# Altium PCB v7-9BProto-motorPCB.PcbDoc
Units mil, origin at the board's own origin, x right, y up, seen from the top; angles counter-clockwise.
Board outline 3468 x 3684.34 mil, 2 copper layers (Top Layer, Bottom Layer); 91 components, 114 nets, 309 pads, 47 vias.
Unrouted connection lines stored in the file: 234.
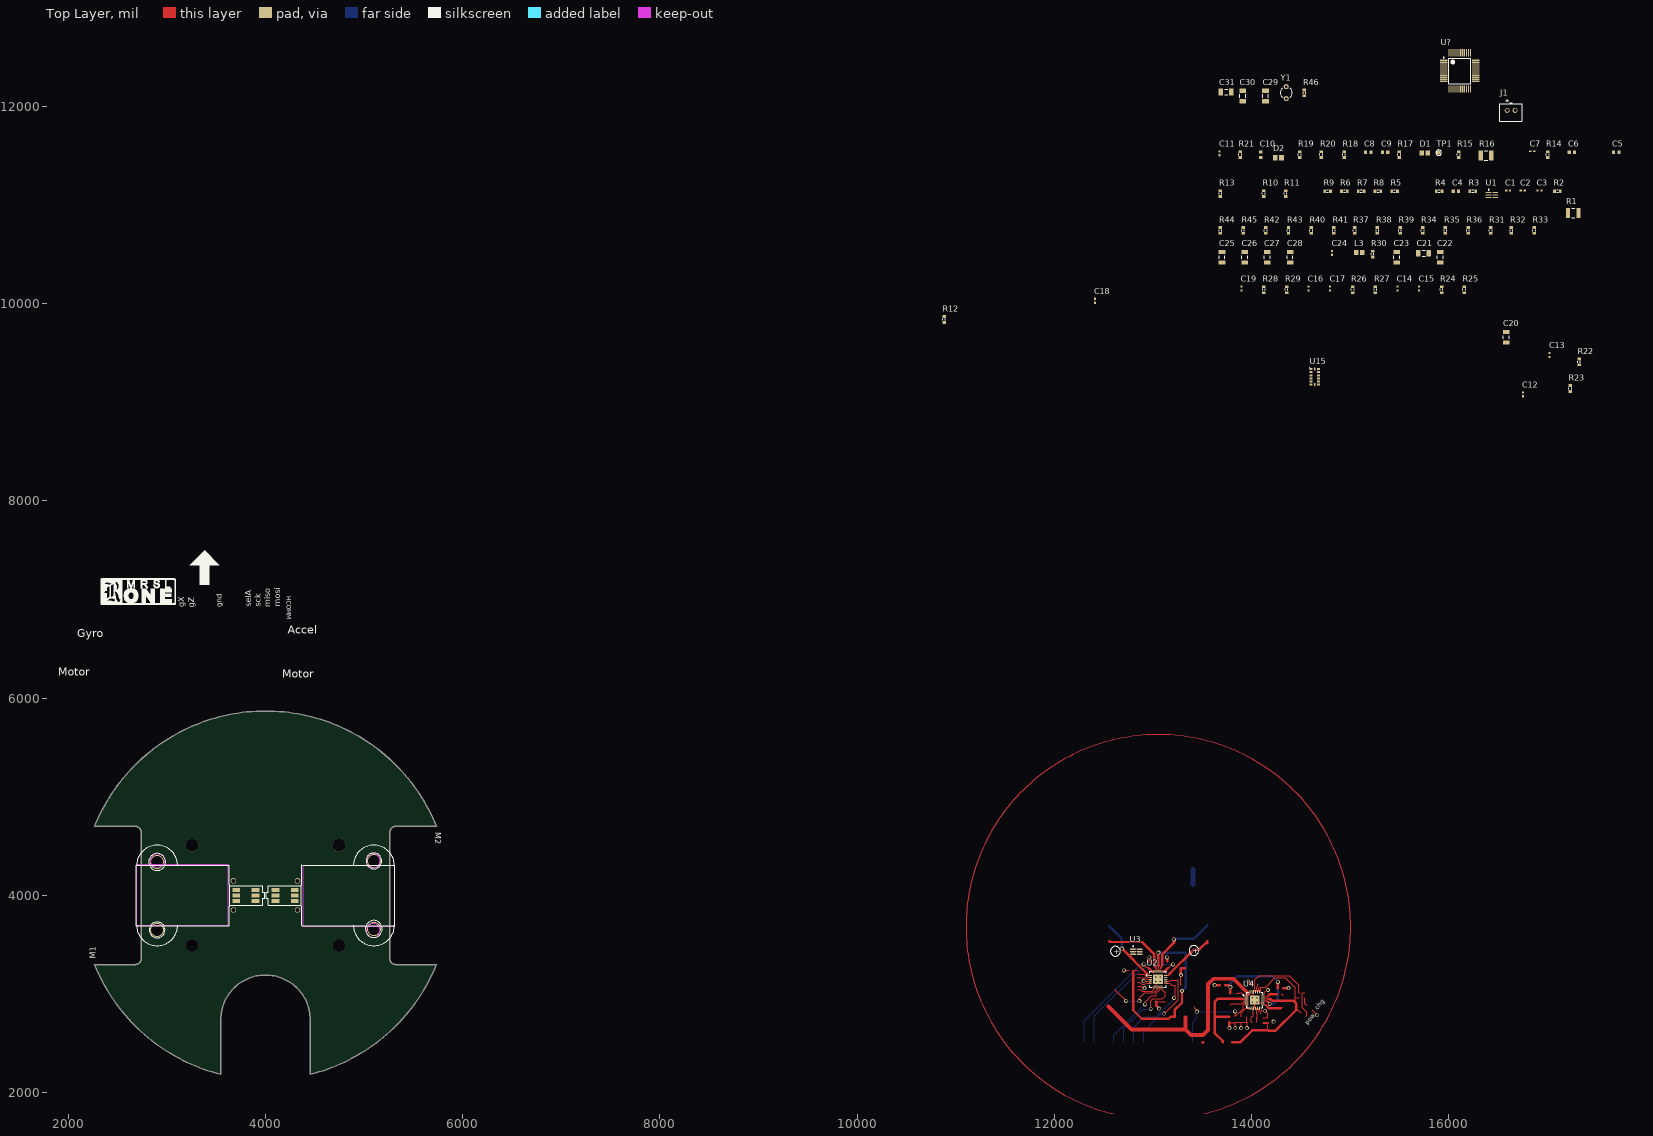
[diagram p0: Top Layer view]
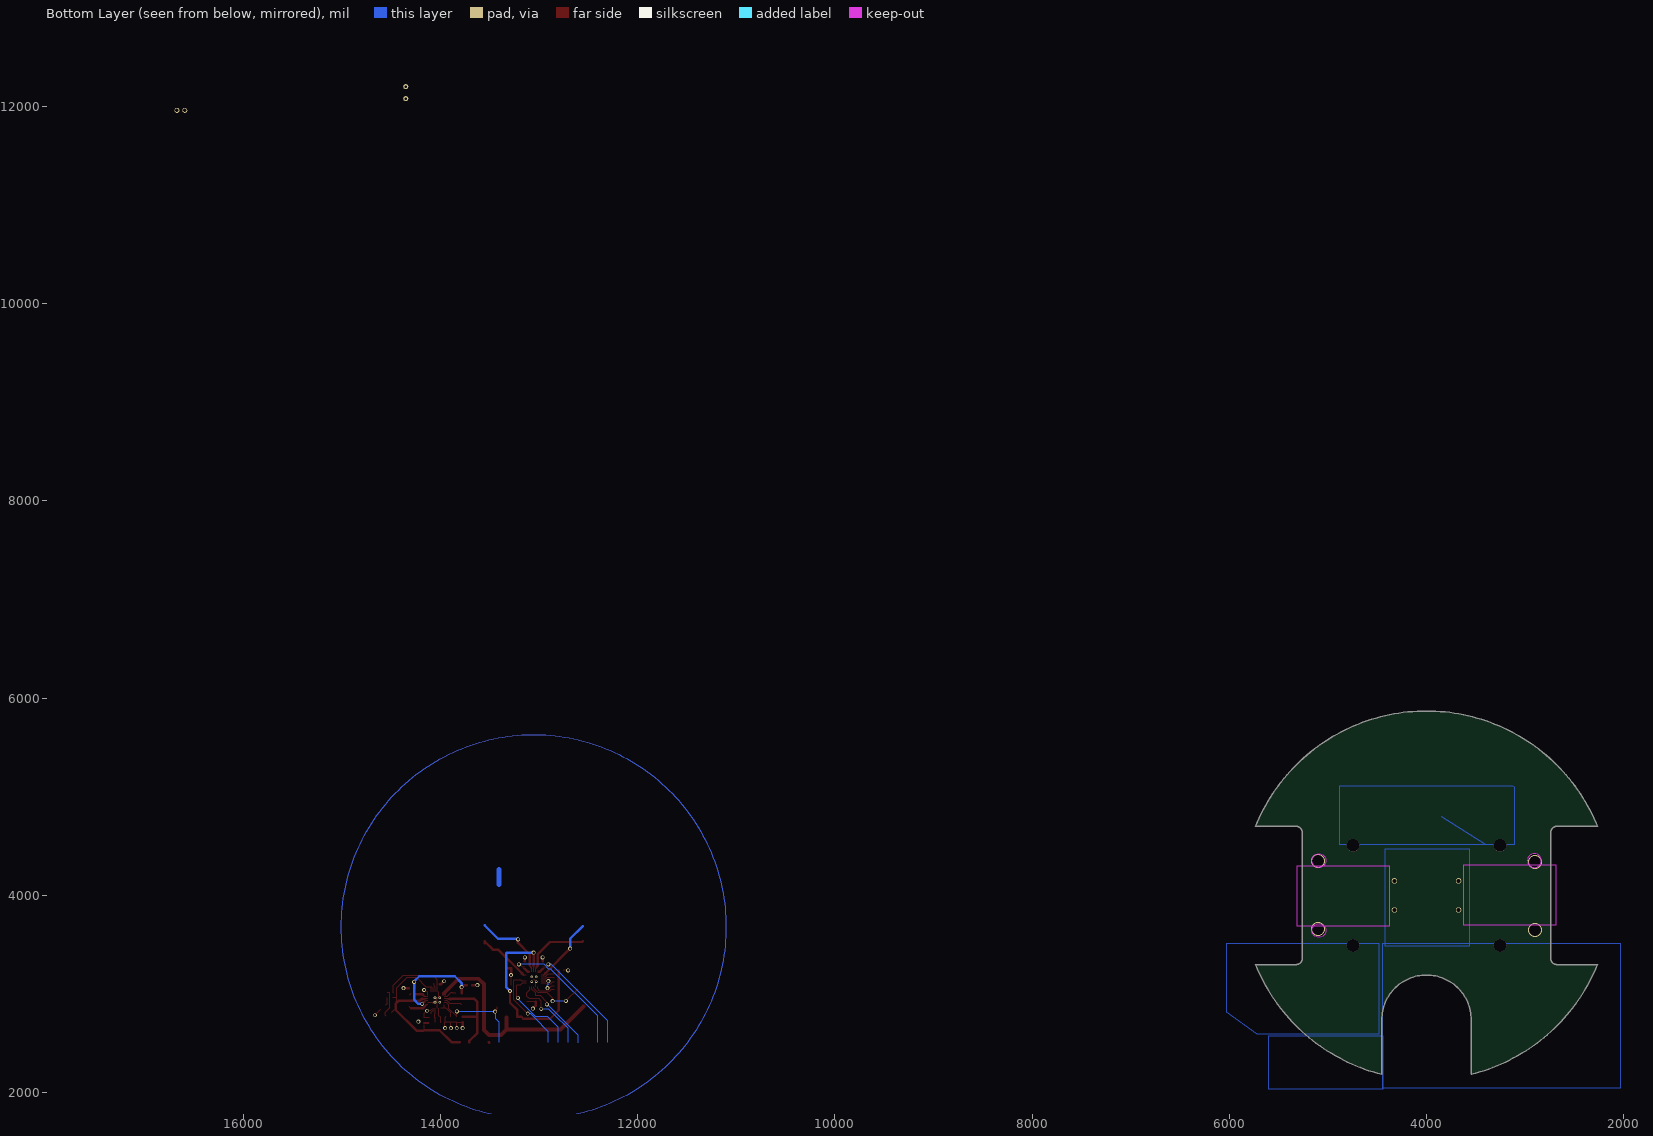
[diagram p1: Bottom Layer view, seen from below]

## Layer stack, top to bottom
Top Layer: signal copper 1.4
Dielectric: dielectric 12.6, FR-4, Dk 4.8
Bottom Layer: signal copper 1.4

## Board outline
2266,3299 2677,3299 ccw(c2677,3362) 2740,3362 2740,4638 ccw(c2677,4638) 2677,4701 2266,4701 2266.46,4701.24 cw(c4000,4000) 5733.69,4700.88 5734,4701 5323,4701 ccw(c5323,4638) 5260,4638 5260,3362 ccw(c5323,3362) 5323,3299 5734,3299 5733.69,3299.12 cw(c4000,4000) 4453.06,2185.71 4453,2186 4453,2740 ccw(c4000,2740) 3547,2740 3547,2186 3547.16,2185.66 cw(c4000,4000)
cut-out: 2906,4282.66 2892.28,4284.01 2879.08,4288.02 2866.92,4294.52 2856.26,4303.26 2847.52,4313.92 2841.02,4326.08 2837.01,4339.28 2835.66,4353 2837.01,4366.72 2841.02,4379.92 2847.52,4392.08 2856.26,4402.74 2866.92,4411.48 2879.08,4417.98 2892.28,4421.99 2906,4423.34 2919.72,4421.99 2932.92,4417.98 2945.08,4411.48 2955.74,4402.74 2964.48,4392.08 2970.98,4379.92 2974.99,4366.72 2976.34,4353 2974.99,4339.28 2970.98,4326.08 2964.48,4313.92 2955.74,4303.26 2945.08,4294.52 2932.92,4288.02 2919.72,4284.01
cut-out: 5021.66,3645 5023.01,3631.28 5027.02,3618.08 5033.52,3605.92 5042.26,3595.26 5052.92,3586.52 5065.08,3580.02 5078.28,3576.01 5092,3574.66 5105.72,3576.01 5118.92,3580.02 5131.08,3586.52 5141.74,3595.26 5150.48,3605.92 5156.98,3618.08 5160.99,3631.28 5162.34,3645 5160.99,3658.72 5156.98,3671.92 5150.48,3684.08 5141.74,3694.74 5131.08,3703.48 5118.92,3709.98 5105.72,3713.99 5092,3715.34 5078.28,3713.99 5065.08,3709.98 5052.92,3703.48 5042.26,3694.74 5033.52,3684.08 5027.02,3671.92 5023.01,3658.72
cut-out: 5021.66,4353 5023.01,4339.28 5027.02,4326.08 5033.52,4313.92 5042.26,4303.26 5052.92,4294.52 5065.08,4288.02 5078.28,4284.01 5092,4282.66 5105.72,4284.01 5118.92,4288.02 5131.08,4294.52 5141.74,4303.26 5150.48,4313.92 5156.98,4326.08 5160.99,4339.28 5162.34,4353 5160.99,4366.72 5156.98,4379.92 5150.48,4392.08 5141.74,4402.74 5131.08,4411.48 5118.92,4417.98 5105.72,4421.99 5092,4423.34 5078.28,4421.99 5065.08,4417.98 5052.92,4411.48 5042.26,4402.74 5033.52,4392.08 5027.02,4379.92 5023.01,4366.72

## Design rules (kind name [scope] priority, off if disabled: settings)
Clearance [All] p1: gap=8
PolygonConnect [All] p1: connectstyle=Relief reliefconductorwidth=10 reliefentries=4 polygonreliefangle="90 Angle"
RoomDefinition SoundChip [InComponentClass('SoundChip')] p1: confinementstyle=ConfineIn formatcopy=TRUE lockcomponents=FALSE outline 13654,11716 15158,11716 15158,12292 13654,12292
RoomDefinition power [InComponentClass('power')] p2: confinementstyle=ConfineIn formatcopy=TRUE lockcomponents=FALSE outline 13654,10087 17773,10087 17773,11667 13654,11667
RoomDefinition GyroAccelHeaders [InComponentClass('GyroAccelHeaders')] p3: confinementstyle=ConfineIn formatcopy=TRUE lockcomponents=FALSE outline 13654,10111 16763,10111 16763,11667 13654,11667
RoomDefinition BumpSensors [InComponentClass('BumpSensors')] p4: confinementstyle=ConfineIn formatcopy=TRUE lockcomponents=FALSE outline 13654,10087 17217,10087 17217,10297 13654,10297
RoomDefinition LineCliffSensors [InComponentClass('LineCliffSensors')] p5: confinementstyle=ConfineIn formatcopy=TRUE lockcomponents=FALSE outline 0,0 2000,0 2000,1000 0,1000
RoomDefinition motorEncoder [InComponentClass('motorEncoder')] p6: confinementstyle=ConfineIn formatcopy=TRUE lockcomponents=FALSE outline 0,0 2000,0 2000,1000 0,1000
RoutingVias [All] p1: holewidth=25 width=40 viastyle="Through Hole" minholewidth=25 minwidth=40 maxholewidth=25 maxwidth=40
SMDNeckDown [All] p1: percent=50.000
SilkscreenOverComponentPads [All] p1: minsilkscreentomaskgap=10
SolderMaskExpansion [All] p1: expansion=4
Width "Schematic Width Constraint_2" [InNet('VBAT')] p1: maxlimit=25 minlimit=10 preferedwidth=25 minimp=50.000000 maximp=50.000000 favimp=50.000000
Width "Schematic Width Constraint_14" [InNet('NetJ1_1')] p2: maxlimit=25 minlimit=10 preferedwidth=25 minimp=50.000000 maximp=50.000000 favimp=50.000000
Width "Schematic Width Constraint_13" [InNet('5VUSB_SW')] p3: maxlimit=25 minlimit=10 preferedwidth=25 minimp=50.000000 maximp=50.000000 favimp=50.000000
Width "Schematic Width Constraint_12" [InNet('MOT_0B')] p4: maxlimit=25 minlimit=10 preferedwidth=20 minimp=50.000000 maximp=50.000000 favimp=50.000000
Width "Schematic Width Constraint_11" [InNet('MOT_0A')] p5: maxlimit=25 minlimit=10 preferedwidth=20 minimp=50.000000 maximp=50.000000 favimp=50.000000
Width "Schematic Width Constraint_10" [InNet('MOT1_B')] p6: maxlimit=25 minlimit=10 preferedwidth=20 minimp=50.000000 maximp=50.000000 favimp=50.000000
Width "Schematic Width Constraint_9" [InNet('MOT1_A')] p7: maxlimit=25 minlimit=10 preferedwidth=20 minimp=50.000000 maximp=50.000000 favimp=50.000000
Width "Schematic Width Constraint_8" [InNet('VBAT_MOT_SW')] p8: maxlimit=25 minlimit=10 preferedwidth=20 minimp=50.000000 maximp=50.000000 favimp=50.000000
Width "Schematic Width Constraint_7" [InNet('VBAT +300')] p9: maxlimit=25 minlimit=10 preferedwidth=25 minimp=50.000000 maximp=50.000000 favimp=50.000000
Width "Schematic Width Constraint_6" [InNet('NetL2_1')] p10: maxlimit=25 minlimit=10 preferedwidth=25 minimp=50.000000 maximp=50.000000 favimp=50.000000
Width "Schematic Width Constraint_5" [InNet('NetL2_2')] p11: maxlimit=25 minlimit=10 preferedwidth=25 minimp=50.000000 maximp=50.000000 favimp=50.000000
Width "Schematic Width Constraint_3" [InNet('VBAT_SW')] p12: maxlimit=50 minlimit=10 preferedwidth=25 minimp=50.000000 maximp=50.000000 favimp=50.000000
Width "Schematic Width Constraint_1" [InNet('GND')] p13: maxlimit=25 minlimit=10 preferedwidth=25 minimp=50.000000 maximp=50.000000 favimp=50.000000
Width "Schematic Width Constraint" [InNet('3.3V')] p14: maxlimit=100 minlimit=10 preferedwidth=25 minimp=50.000000 maximp=50.000000 favimp=50.000000
Width MotorWidth [InNetClass('MotorNets')] p15: maxlimit=25 minlimit=8 preferedwidth=25
Width [All] p16: maxlimit=8 minlimit=8 preferedwidth=8
27 further rules are at their usual default settings.

## Classes and differential pairs
component class GyroAccelHeaders: C20 C21 C22 C23 C24 C25 C26 C27 C28 C51 J2 L3 R30 U15
component class LineCliffSensors: Q1 Q2 Q3 Q4 Q5 R31 R32 R33 R34 R35 R36 R37 R38 R39 R40 R41 R42 R43 R44 R45 U9 U10 U11 U12 U13
component class motorEncoder: C1 C2 C3 C4 M1 M2 P1 R1 R2 R3 R4 R5 R6 R7 R8 R9 R10 R11 R12 R13 U1 U2 U3
component class power: C5 C6 C7 C8 C9 C10 C11 D1 D2 J1 J3 L1 L2 R14 R15 R16 R17 R18 R19 R20 R21 TP1 U4
component class SoundChip: * C29 C30 C31 C? R46 R? U? Y1 Y?
component class BumpSensors: C12 C13 C14 C15 C16 C17 C18 C19 R22 R23 R24 R25 R26 R27 R28 R29 U5 U6 U7 U8 U9 U10 U11 U12

## Components (designator, comment, footprint, x,y, rotation, side; value= is the part's Value field where it differs from the comment)
C1 "Cap Semi" CAPC1005L 16599,11150 r0 top
C2 "Cap Semi" CAPC1005L 16749,11150 r0 top
C3 "Cap Semi" CAPC1005L 16918,11150 r0 top
C4 "Cap Semi" CAPC1608L 16071,11142 r0 top
C5 "Cap" CAPC1608L 17697,11538 r0 top
C6 "Cap" CAPC1608L 17247,11538 r0 top
C7 "Cap" CAPC1005L 16845,11546 r0 top
C8 "Cap" CAPC1608L 15182,11538 r0 top
C9 "Cap" CAPC1608L 15352,11538 r0 top
C10 "Cap" CAPC1608L 14093,11512 r90 top
C11 "Cap" CAPC1005L 13675,11524 r90 top
C12 "Cap Semi" CAPC1005L 16750,9080 r90 top
C13 "Cap Semi" CAPC1005L 17020,9480 r90 top
C14 "Cap Semi" CAPC1005L 15476,10154 r90 top
C15 "Cap Semi" CAPC1005L 15697,10154 r90 top
C16 "Cap Semi" CAPC1005L 14576,10154 r90 top
C17 "Cap Semi" CAPC1005L 14796,10154 r90 top
C18 "Cap Semi" CAPC1005L 12410,10030 r90 top
C19 "Cap Semi" CAPC1005L 13895,10154 r90 top
C20 "Cap Semi" CAPC3216L 16580,9660 r90 top
C21 "Cap Semi" CAPC3216L 15743,10513 r0 top
C22 "Cap Semi" CAPC3216L 15913,10472 r90 top
C23 "Cap Semi" CAPC3216L 15472,10472 r90 top
C24 "Cap Semi" CAPC1005L 14815,10515 r90 top
C25 "Cap Semi" CAPC3216L 13699,10472 r90 top
C26 "Cap Semi" CAPC3216L 13929,10472 r90 top
C27 "Cap Semi" CAPC3216L 14159,10472 r90 top
C28 "Cap Semi" CAPC3216L 14389,10472 r90 top
C29 "Cap Semi" CAPC3216L 14140,12106 r90 top
C30 "Cap Semi" CAPC3216L 13910,12106 r90 top
C31 "Cap Semi" CAPC3216L 13740,12147 r0 top
D1 "Charge" INDC2012L 15754,11528 r0 top
D2 "Power" INDC2012L 14270,11480 r0 top
J1 "Bat" BatteryConnJST 16630,11960 r0 top
L3 "Inductor" INDC2012L 15091,10519 r0 top
M1 "motorEncoder_V7b" motorEncoder_V7b 3950,4000 r180 top
M2 "motorEncoder_V7b" motorEncoder_V7b 4050,4000 r0 top
R1 "Res3" RESC3225L 17260,10920 r0 top
R2 "" RESC1608L 17100,11142 r0 top
R3 "" RESC1608L 16241,11142 r0 top
R4 "" RESC1608L 15901,11142 r0 top
R5 "" RESC1608L 15449,11142 r0 top
R6 "Res3" RESC1608L 14939,11142 r0 top
R7 "Res3" RESC1608L 15109,11142 r0 top
R8 "Res3" RESC1608L 15279,11142 r0 top
R9 "Res3" RESC1608L 14769,11142 r0 top
R10 "Res3" RESC1608L 14123,11116 r90 top
R11 "Res3" RESC1608L 14343,11116 r90 top
R12 "" RESC1608L 10880,9840 r90 top
R13 "" RESC1608L 13683,11116 r90 top
R14 "Res3" RESC1608L 17001,11512 r90 top
R15 "Res3" RESC1608L 16099,11512 r90 top
R16 "Res3" RESC3225L 16376,11504 r0 top
R17 "Res3" RESC1608L 15496,11512 r90 top
R18 "Res3" RESC1608L 14936,11512 r90 top
R19 "Res3" RESC1608L 14486,11512 r90 top
R20 "Res3" RESC1608L 14706,11512 r90 top
R21 "Res3" RESC1608L 13883,11512 r90 top
R22 "Res3" RESC1608L 17320,9410 r90 top
R23 "Res3" RESC1608L 17230,9140 r90 top
R24 "Res3" RESC1608L 15925,10142 r90 top
R25 "Res3" RESC1608L 16155,10142 r90 top
R26 "Res3" RESC1608L 15024,10142 r90 top
R27 "Res3" RESC1608L 15254,10142 r90 top
R28 "Res3" RESC1608L 14124,10142 r90 top
R29 "Res3" RESC1608L 14354,10142 r90 top
R30 "Res3" RESC1608L 15226,10503 r90 top
R31 "Res3" RESC1608L 16424,10743 r90 top
R32 "Res3" RESC1608L 16634,10743 r90 top
R33 "Res3" RESC1608L 16864,10743 r90 top
R34 "Res3" RESC1608L 15734,10743 r90 top
R35 "Res3" RESC1608L 15964,10743 r90 top
R36 "Res3" RESC1608L 16194,10743 r90 top
R37 "Res3" RESC1608L 15044,10743 r90 top
R38 "Res3" RESC1608L 15274,10743 r90 top
R39 "Res3" RESC1608L 15504,10743 r90 top
R40 "Res3" RESC1608L 14603,10743 r90 top
R41 "Res3" RESC1608L 14833,10743 r90 top
R42 "Res3" RESC1608L 14143,10743 r90 top
R43 "Res3" RESC1608L 14373,10743 r90 top
R44 "Res3" RESC1608L 13683,10743 r90 top
R45 "Res3" RESC1608L 13913,10743 r90 top
R46 "Res3" RESC1608L 14534,12137 r90 top
TP1 "TestPoint" TestPoint 15896,11531 r0 top
U1 "schmit trigger" DCK(R-PDSO-C6) 16436,11102 r0 top
U2 "MOTOR-A3906" QFN-20 13050,3150 r0 top
U3 "schmit trigger" DCK(R-PDSO-C6) 12830,3430 r0 top
U4 "LTC3566" QFN-24 14030,2940 r0 top
U15 "MMA7455L" MMA7455L 14580,9160 r0 top
U? "VS1033" LQFP-48 16110,12360 r0 top
Y1 "12.288MHZ" BCY-W2/D3.1 14350,12140 r0 top

## Footprints (in the part's own frame and the unit in brackets; to place one, negate y for a bottom-side part, rotate by r counter-clockwise, add the part's x,y. Pads: shape width x height; smd on the part's side, far side on the other; paste and mask are expansions set on the pad)
BatteryConnJST [mil] "Connector for Battery"
  round 50 hole 35: 1(-40,0) 2(40,0)
  silkscreen extent -117,-110 116,115
BCY-W2/D3.1 [mm] "Crystal, Thru-Hole; 2 Leads; Body 3.1 x 8.2 mm (Dia.xH)"
  round 1.3 hole 0.7: 1(0,1.55) 2(0,-1.55)
  silkscreen extent -1.55,-1.19 1.55,1.17
CAPC1005L [mm] "Chip Capacitor, Body 1.0x0.5mm, IPC High Density"
  rect 0.6x0.5 smd: 1(-0.5,0) 2(0.5,0)
  body extent -0.55,-0.3 0.55,0.3, height 1.3
CAPC1608L [mm] "Chip Capacitor, Body 1.6x0.8mm, IPC High Density"
  rect 0.8x0.9 smd: 1(-0.7,0) 2(0.7,0)
  body extent -0.87,-0.48 0.87,0.48, height 1.3
CAPC3216L [mm] "Chip Capacitor, Body 3.2x1.6mm, IPC High Density"
  rect 1.1x1.7 smd: 1(-1.35,0) 2(1.35,0)
  silkscreen extent -0.4,-0.75 0.4,0.75, body extent -1.7,-0.9 1.7,0.9, height 1.3
DCK(R-PDSO-C6) [mm] "TSOP, 6-Leads, Body 2.2x1.4mm (max), Pitch 0.65mm, IPC Medium Density"
  oval 1.5x0.35 smd: 1(-0.85,0.65) 2(-0.85,0) 3(-0.85,-0.65) 4(0.85,-0.65) 5(0.85,0) 6(0.85,0.65)
  silkscreen extent -0.97,1.25 -0.72,1.5, body extent -0.7,-1.07 0.7,1.08, height 1.1
INDC2012L [mm] "Chip Inductor, Body 2.0x1.2mm, IPC High Density"
  rect 1.2x1.4 smd: 1(-0.8,0) 2(0.8,0)
  body extent -1.1,-0.7 1.1,0.7, height 0.55
LQFP-48 [mm] "TSQFP, 48-Leads, Body 9.1x9.1mm (max), Pitch 0.50mm, IPC Medium Density"
  rect 1.9x0.3 smd: 1(-4.15,2.75) 2(-4.15,2.25) 3(-4.15,1.75) 4(-4.15,1.25) 5(-4.15,0.75) 6(-4.15,0.25) 7(-4.15,-0.25) 8(-4.15,-0.75) 9(-4.15,-1.25) 10(-4.15,-1.75) 11(-4.15,-2.25) 12(-4.15,-2.75) 25(4.15,-2.75) 26(4.15,-2.25) 27(4.15,-1.75) 28(4.15,-1.25) 29(4.15,-0.75) 30(4.15,-0.25) 31(4.15,0.25) 32(4.15,0.75) 33(4.15,1.25) 34(4.15,1.75) 35(4.15,2.25) 36(4.15,2.75)
  rect 0.3x1.9 smd: 13(-2.75,-4.65) 14(-2.25,-4.65) 15(-1.75,-4.65) 16(-1.25,-4.65) 17(-0.75,-4.65) 18(-0.25,-4.65) 19(0.25,-4.65) 20(0.75,-4.65) 21(1.25,-4.65) 22(1.75,-4.65) 23(2.25,-4.65) 24(2.75,-4.65) 37(2.75,4.65) 38(2.25,4.65) 39(1.75,4.65) 40(1.25,4.65) 41(0.75,4.65) 42(0.25,4.65) 43(-0.25,4.65) 44(-0.75,4.65) 45(-1.25,4.65) 46(-1.75,4.65) 47(-2.25,4.65) 48(-2.75,4.65)
  silkscreen extent -4.27,-3.3 2.8,3.57, body extent -3.5,-3.5 3.5,3.5, height 1.6
MMA7455L [mm] "LGA, 14 pad, accelerometer footprint"
  rect 0.8x0.5 smd: 1(0.499,4.499) 2(0.499,3.699) 3(0.499,2.9) 4(0.499,2.1) 5(0.499,1.301) 6(0.499,0.501) 8(2.501,0.501) 9(2.501,1.301) 10(2.501,2.1) 11(2.501,2.9) 12(2.501,3.699) 13(2.501,4.499)
  rect 0.5x0.8 smd: 7(1.5,0.501) 14(1.5,4.507)
  silkscreen extent 0.18,4.72 0.28,4.83
motorEncoder_V7b [mm] "Precision Wire Wound Inductor, 2-Leads, Body 2.5x2.3mm, IPC Medium Density"
  rect 2x1 smd: A(1.291,1.4) C(6.291,1.4) E1(6.291,0) E2(6.291,-1.4) K(1.291,-1.4) NC(1.291,0)
  round 1.4 hole 1: M1(7,3.75) M2(7,-3.75)
  Keep-Out Layer region: 8.382,-7.874 32.004,-7.874 32.004,7.62 8.382,7.62
  silkscreen extent -1.02,-12.93 32,12.93
QFN-20 [mm]
  oval 0.85x0.25 smd: 1(-1.975,1) 2(-1.975,0.5) 3(-1.975,0) 4(-1.975,-0.5) 5(-1.975,-1) 11(1.975,-1) 12(1.975,-0.5) 13(1.975,0) 14(1.975,0.5) 15(1.975,1)
  oval 0.25x0.85 smd: 6(-1,-1.975) 7(-0.5,-1.975) 8(0,-1.975) 9(0.5,-1.975) 10(1,-1.975) 16(1,1.975) 17(0.5,1.975) 18(0,1.975) 19(-0.5,1.975) 20(-1,1.975)
  rect 2.5x2.5 smd: 21(0,0)
  silkscreen extent -3.07,-2.1 2.1,2.1, body extent -2.07,-2.07 2.07,2.07, height 0.8
QFN-24 [mm]
  oval 0.95x0.25 smd: 1(-2.1,1.25) 2(-2.1,0.75) 3(-2.1,0.25) 4(-2.1,-0.25) 5(-2.1,-0.75) 6(-2.1,-1.25) 13(2.1,-1.25) 14(2.1,-0.75) 15(2.1,-0.25) 16(2.1,0.25) 17(2.1,0.75) 18(2.1,1.25)
  oval 0.25x0.95 smd: 7(-1.25,-2.1) 8(-0.75,-2.1) 9(-0.25,-2.1) 10(0.25,-2.1) 11(0.75,-2.1) 12(1.25,-2.1) 19(1.25,2.1) 20(0.75,2.1) 21(0.25,2.1) 22(-0.25,2.1) 23(-0.75,2.1) 24(-1.25,2.1)
  rect 2.4x2.4 smd: 25(0,0)
  silkscreen extent -3.02,-2.05 2.05,2.05, body extent -2.05,-2.05 2.05,2.05, height 0.8
RESC1608L [mm] "Chip Resistor, Body 1.6x0.8mm, IPC High Density"
  rect 0.7x0.9 smd: 1(-0.75,0) 2(0.75,0)
  silkscreen extent -0.2,-0.35 0.2,0.35, body extent -0.85,-0.48 0.85,0.48, height 0.9
RESC3225L [mm] "Chip Resistor, Body 3.2x2.5mm, IPC High Density"
  rect 1.1x2.6 smd: 1(-1.35,0) 2(1.35,0)
  silkscreen extent -0.4,-1.2 0.4,1.2, body extent -1.68,-1.32 1.68,1.32, height 0.9
TestPoint [mil]
  round 40 smd: 1(0,0)
  silkscreen extent -28,-28 28,28

## Part data
C1 C2 C3 C4 C12 C13 C14 C15 C16 C17 C18 C19 C20 C21 C22 C23 C24 C25 C26 C27 C28 C29 C30 C31: "Capacitor (Semiconductor SIM Model)"
C5 C6 C7 C8 C9 C10 C11: "Capacitor"
D1 D2: library part LED2, "Typical RED, GREEN, YELLOW, AMBER GaAs LED"
J1: library part BatteryConnJST
R1 R6 R7 R8 R9 R10 R11 R14 R15 R16 R17 R18 R19 R20 R21 R22 R23 R24 R25 R26 R27 R28 R29 R30 R31 R32 R33 R34 R35 R36 R37 R38 R39 R40 R41 R42 R43 R44 R45 R46: "Resistor"
R2 R3 R4 R5 R12 R13: library part Res3, "Resistor"
U15: "3axis accelerometer"
Y1: library part XTAL, "Crystal Oscillator"

## Free pads (board coordinates)
  round 129 hole 129 unplated: 2(4745,4508) 3(4745,3492) 6(3255,3492) 8(3255,4508)
  round 96 hole 96 unplated: 9(2907,4354) 10(2907,3646)
  round 96 hole 96: 11(5093,3646) 12(5093,4354)

## Via types
v1: diameter 40, hole 25, Top Layer to Bottom Layer, 35 vias
v2: diameter 25.98, hole 12.99, Top Layer to Bottom Layer, 8 vias
v3: diameter 140, hole 120, Top Layer to Bottom Layer, 4 vias

## Nets (pads, with @x,y where several pads share a name; then routed paths per layer and width w, separated by ;. In a path a pad name is that pad's centre, name@x,y a point inside that pad or via, vN(x,y) a via of type N, cw(c..) or ccw(c..) an arc to the next point about the centre after c; other vN are vias at no path point)
3.3V: C10.2 C12.2 C13.2 C14.2 C15.2 C16.2 C17.2 C18.2 C19.2 D1.1 L3.2 M1.C M2.C R3.2 R12.2 R19.1 R20.2 R22.2 R23.2 R24.2 R25.2 R26.2 R27.2 R28.2 R29.2 R31.2 R32.2 R33.2 R34.1 R35.1 R36.1 R40.2 R41.2 R42.1 R43.1 U1.5 U3.5 U4.10 U4.13 U4.14
  other v1: 12963,3371 13143,3371
3.3VLDO: C9.1 U4.1 U4.24
5VUSB_SW: C6.2 U4.21
AVDD: U?.5 U?.7 U?.24 U?.31 U?.38 U?.43 U?.45
BUMP1: 
BUMP2: 
BUMP3: 
BUMP4: 
BUMP5: 
BUMP6: 
BUMP7: 
BUMP8: 
CHRG: R17.1 U4.16
CHRGEN: R18.2 TP1.1 U2.3 U4.23
  other v1: 13443,2821 13832,2825 12861,2929 12726,2930
CLIFF1: R31.1
CLIFF2: R32.1
CLIFF3: R33.1
CLIFF4: R40.1
CLIFF5: R41.1
CLK: U15.14
CS: U15.7 U?.23
DR: 
DREQ: U?.8
DVDD: U?.6 U?.14 U?.19 U?.32
GBUE: U?.42
GND: C4.1 C5.1 C6.1 C7.1 C8.2 C9.2 C10.1 C12.1 C13.1 C14.1 C15.1 C16.1 C17.1 C18.1 C19.1 C20.1 C21.2 C22.2 C24.1 C25.1 C26.1 C27.1 C28.1 C30.1 C31.1 D2.2 J1.2 M1.K M2.K R2.2 R4.1 R5.1 R6.2 R7.2 R8.2 R9.2 R10.2 R11.2 R13.1 R14.1 R15.2 R18.1 R21.2 R30.1 R37.2 R38.2 R39.2 R44.2 R45.2 R46.1 U1.2 U2.2 U2.21 U3.2 U4.3 U4.6 U4.8 U4.12 U4.17 U4.25 U15.2 U15.5 U?.4 U?.16 U?.17 U?.20 U?.21 U?.22 U?.37 U?.40 U?.41 U?.47 Y1.1
  other v1: 13952,2654 13773,2655 13833,2655 13892,2655 14223,2721 14663,2785 14133,2831 13061,2853 14163,3041 14373,3061 13623,3091 13962,3130 13283,3191 12703,3241
  other v2: 14006.38,2916.38 14053.62,2916.38 14006.38,2963.62 14053.62,2963.62 13026.38,3126.38 13073.62,3126.38 13026.38,3173.62 13073.62,3173.62
GPIO0: U?.33
GPIO1: U?.34
GPIO2: U?.9
GPIO3: U?.10
INT1: U15.8
INT2: U15.9
INT3: 
LEFT: U?.46
MICN: U?.2
MICP: U?.1
MISO: U15.12
MOSI: U15.13
MOT0_CUR: R11.1 U2.15
  other v1: 12903,3301
MOT0_PWMA: R6.1 U2.4
  other v1: 12920,2895
MOT0_PWMB: R7.1 U2.5
  other v1: 12976,2849
MOT1_A: M2.M2 U2.10
MOT1_B: M2.M1 U2.12
  other v1: 13211,3555
MOT1_CUR: R10.1 U2.11
  other v1: 13203,3301
MOT1_PWMA: R9.1 U2.6
  other v1: 13213,2961
MOT1_PWMB: R8.1 U2.7
  other v1: 13113,2801
MOT_0A: M1.M2 U2.16
  other v1: 12683,3461
MOT_0B: M1.M1 U2.14
NetC1_1: C1.1 U2.19
NetC1_2: C1.2 U2.1
NetC2_1: C2.1 U2.18
NetC2_2: C2.2 U2.20
NetC3_2: C3.2 U2.17
NetC7_2: C7.2 R14.2 U4.2
NetC11_1: C11.1 R19.2 R21.1 U4.4
NetC11_2: C11.2 U4.5
NetC23_1: C23.1 R30.2
NetC29_1: C29.1 C31.2
NetC29_2: C29.2 R46.2 U?.18 Y1.2
NetC30_2: C30.2 U?.44
NetD1_2: D1.2 R17.2
NetD2_1: D2.1 R20.1
NetJ1_1: J1.1 R16.2
NetL1_1: U4.22
NetL2_1: U4.7
NetL2_2: U4.11
NETLABEL81: 
NETLABEL82: 
NETLABEL83: 
NETLABEL84: 
NETLABEL85: 
NetM1_A: M1.A R3.1
NetM2_A: M2.A R12.1
NetQ1_1: R37.1
NetQ2_1: R38.1
NetQ3_1: R39.1
NetQ4_1: R44.1
NetQ5_1: R45.1
NetR15_1: R15.1 U4.15
NetR22_1: R22.1
NetR23_1: R23.1
NetR24_1: R24.1
NetR25_1: R25.1
NetR26_1: R26.1
NetR27_1: R27.1
NetR28_1: R28.1
NetR29_1: R29.1
NetR34_2: R34.2
NetR35_2: R35.2
NetR36_2: R36.2
NetR42_2: R42.2
NetR43_2: R43.2
PLLFILT: C20.2 C23.2
QEI_0A: U1.6
QEI_0A_ANALOG: M1.E1 R4.2 U1.1
QEI_0B: U1.4
QEI_0B_ANALOG: M1.E2 R2.1 U1.3
QEI_1A: U3.6
QEI_1A_ANALOG: M2.E1 R13.2 U3.1
QEI_1B: U3.4
QEI_1B_ANALOG: M2.E2 R5.2 U3.3
RESET: U?.3
RIGHT: U?.39
RX: U?.26
SCLK: U?.28
SI: U?.29
SO: U?.30
TX: U?.27
VBAT: R16.1
"VBAT +300": C5.2 C8.1 U4.9 U4.20
  other v1: 14183,2901 13783,3071 14265.44,3123.44
VBAT_MOT_SW: C3.1 C4.2 R1.2 U2.13
  other v1: 13293,3031 13053,3421
VBAT_SW: R1.1 U4.19
VCC: 
VDDA: C21.1 C22.1 C24.2 C25.2 C26.2 C27.2 C28.2 L3.1 U15.1 U15.4 U15.6
pads on no net: M1.NC M2.NC U2.8 U2.9 U4.18 U15.3 U15.10 U15.11 U?.11 U?.12 U?.13 U?.15 U?.25 U?.35 U?.36 U?.48
copper on no net: | length 24090.8
  Top Layer w8: 12607,3049 12726,2930 ; 12842.69,3120.69 12863.31,3120.69 12885,3099 12916.25,3099 12928.57,3111.32 12974.93,3111.32 ; 12843,3041.31 12877.43,3041.31 12889.75,3029 12991,3029 13013.32,3051.32 13013.32,3072.93 ; 12843,3080.69 12873.31,3080.69 12893,3061 v1(12913,3061) ; 12843,3160.06 12845.94,3163 12921,3163 12933.31,3150.69 12974.93,3150.69 ; 12843,3201.31 12908.04,3201.31 12938.98,3170.37 12974.93,3170.37 ; 12861,2930 12861,2959 12913,3011 13006.81,3011 13053,3057.19 13053,3072.62 13052.69,3072.93 ; v1(12903,3131) 12974.93,3131 ; 12903,3301 12932.53,3271.47 12963,3271.47 ; 12920,2896 12920,2917.06 12983.47,2980.53 13033,2980.53 13033,3011 13072.37,3050.37 13072.37,3072.93 ; 12976,2849 12976,2927 12999,2950 13093,2950 13123,2980 ; 12990.56,3228.44 13013.32,3228.44 ; 13092.06,3072.93 13092.06,3041.94 13123,3011 13123,2980.53 ; 13092.06,3228.44 13114.44,3228.44 ; 13113,2801 13253,2941 13253,3141 13181.15,3141 13171.15,3131 13130.44,3131 ; 13130.44,3111.32 13170.68,3111.32 13191,3091 13223.47,3091 13223.47,2971.47 13213,2961 ; 13143,3271.47 13163.47,3271.47 13193,3301 13203,3301 ; 13422,2871 13422,2854 13443,2833 13443,2821 ; 13783,2892.75 13791.25,2901 13900.37,2901 13930.37,2931 13955.11,2931 ; 13832,2825 13832,2821.68 13832.84,2820.84 13832.84,2773.47 ; 13832.84,2770.53 13832.84,2773.47 ; 13892.84,2768.56 13892.84,2810.84 13940.48,2858.48 13975.52,2858.48 13993.79,2858.48 ; 13960.32,2858.48 13960.32,2891.94 ; 13960.32,2911.63 13933.63,2911.63 13911.69,2889.69 13911.69,2852.31 13832.84,2773.47 ; 14000.56,2711.16 13999,2712.72 13999,2715 13997,2717 13997,2765.63 14013.47,2782.1 14013.47,2858.48 ; 14033.16,3023.83 14033.16,3144.16 14075,3186 14383,3186 14478.5,3090.5 14478.5,3011.5 14480,3010 ; 14052.84,2858.48 14053,2858.32 14053,2801 14054,2800 14054,2762 14053,2761 14053,2715 ; 14052.84,3023.83 14052.84,3060.84 14052.84,3067.84 14062,3077 14062,3101 14064,3103 ; 14072.53,2858.48 14072.53,2832.47 14091,2814 14091,2801 ; 14539.53,2961 14539.53,2903.47 14559,2884 ; 14539.53,3011 14511,3011 14511,2863 14556,2818 14556,2783 14546,2773
  Top Layer w10: 12703,3241 12753.31,3241 ; 12792.69,3241 12793,3240.69 12843,3240.69 ; 12933,3211 12953.94,3190.06 12974.93,3190.06 ; 13013,3281 13033,3261 13033,3228.44 ; 13033,2921.47 13123,2921.47 ; 13033,3072.93 13033,3131 13052.69,3150.69 ; 13052.69,3228.44 13053,3291 ; 13072.37,3228.44 13072.37,3260.37 13093,3281 13093,3291 ; 13130.44,3190.06 13152.06,3190.06 13173,3211 ; 13282.53,3091 13282.53,3190.53 13283,3191 ; 13773,2713.44 13774.97,2711.47 13832.84,2711.47 ; 13803,2511 13804,2512 ; 13833,2661 13832.84,2661.16 13832.84,2711.47 ; 13843,3010.69 13873.31,3010.69 ; 13873.63,3011 13893,3011 13933,2971 13960.32,2971 ; 13892.84,2661.16 13892.84,2713.44 ; 13903,2951 13960.32,2951 ; 13943.16,2713.44 13892.84,2713.44 ; 13943.47,2771.16 13949,2765.63 13949,2707.6 13953,2711.6 13953,2661 13952,2660 13952,2657 ; 14013.47,3023.83 14013.47,2970.69 14043,2941.16 ; 14033.16,2858.48 14033.16,2931.32 14043,2941.16 ; 14072.53,2902.47 14072.53,2911.63 ; 14072.53,3023.83 14072.53,3056.49 14085.02,3068.98 14093,3068.98 ; 14092.21,2841.79 14102.21,2831.79 14133,2831.79 ; 14092.21,3023.83 14092.21,3068.19 14093,3068.98 ; 14112.53,2761 14163,2761 14163,2805 14134,2834 ; 14125.68,2891.94 14142.06,2891.94 14177,2857 ; 14125.68,2911.63 14072.53,2911.63 ; 14125.68,2931.32 14152.68,2931.32 14183,2901 ; 14125.68,2951 14183,2951 ; 14125.68,2970.69 14152.69,2970.69 14153,2971 14153.91,2971 14182.91,3000 ; 14125.68,2990.37 14125.68,3016.68 14150,3041 14163,3041 ; 14163,2631 14163,2687 ; 14297.09,2857 14313,2872.91 ; 14301.41,3001 14313,2989.41 ; 14442,2920 14442,3062 14340,3164 14236,3164 14140.98,3068.98 14093,3068.98 ; 14442,2961 14480.47,2961 14479.47,2962 ; 14453,2837 14473.12,2837 14498.87,2811.25 ; 14607.13,2840.75 14662.88,2785 14663,2785 ; 13832.84,2711.47 13834.81,2713.44 13892.84,2713.44 ; 14043,2941.16 14072.53,2911.63
  Top Layer w20: 14117.53,2706 14163,2706
  Top Layer w25: 12557.41,3533.36 12562.77,3528 12886,3528 13013,3401 13013,3291 ; 12683,3461 12933,3211 ; 12799,3233 12799,2836 12885,2750 13159,2750 13180,2771 13219.85,2771 ; 12963,3330.53 12963,3371 ; 12965.26,3253.74 12990.56,3228.44 ; 13033,2921.47 13033,2881 13061,2853 ; 13053,3291 13053,3421 ; 13093,3291 13093,3401 13213,3521 13213,3561 13211,3559 13211,3555 ; 13114.44,3228.44 13140.24,3254.24 ; 13143,3330.53 13143,3371 ; 13173,3211 13413,3451 13466.23,3451 13548.59,3533.36 13548.59,3516.59 ; 13218,2776 13218,2837 13293,2912 13293,3031 ; 13282,3194 13282,3261 13319.85,3261 ; 13503,2508 13508,2513 ; 13623,3091 13675.44,3091 ; 13704,2511 13704,2526 13623,2607 13623,2631 13623,2771 ; 13730.56,3091 13763,3091 13783,3071 13783,3009.25 ; 13773,2655 13773,2713.44 ; 13773,2768.56 13625.44,2768.56 13623,2771 ; 13804,2512 13886,2512 14005,2631 14163,2631 ; 13903,2951 13653,2951 13623,2921 13623,2771 ; 13961,3131 13991,3101 14003.47,3101 ; 14172.5,2630 14200,2630 14201,2629 14241,2629 14452,2840 14452,2902 14423,2931 14210.28,2931 14190.28,2951 14183,2951 ; 14177,2857 14297.09,2857 ; 14182.91,3000 14256,3000 ; 14265.44,3061 14265.44,3123.44 ; 14320.56,3061 14363,3061 14373,3061 ; 14438,2916 14442,2920
  Top Layer w40: 12546,2876 12780,2642 13327,2642 ; 13327,2762 13327,2642 ; 13958,3013 13816,3155 13611,3155 13557,3101 13557,2635 13506,2584 13385,2584 13327,2642
  Bottom Layer w8: 12303,2511 12303,2729 12875,3301 12903,3301 ; 12403,2511 12403,2778 12873.75,3248.75 ; 12603,2508 12603,2583 12643,2623 12916,2896 12918,2896 ; 12703,2511 12703,2651 12838,2786 12900,2848 12973,2848 12975,2848 12976,2849 ; 12746,2928 12747,2929 12861,2929 ; 12803,2511 12803,2664 12909,2770 13030,2770 13207,2947 13207,2964 ; 12876.22,3251 12898.25,3251 12948.25,3301 13203,3301 ; 12903,2511 12903,2620 13036.63,2753.63 13036.63,2754 13083.63,2801 13113,2801 ; v1(12903,3131) 12903,3101 12913,3091 v1(12913,3061) ; 13403,2511 13403,2713 13439,2749 13439,2811 13447,2819 ; 13443,2820.84 13832.84,2820.84 13832,2821.68 13832,2825
  Bottom Layer w25: 12557.41,3686.59 12683,3561 12683,3461 ; 13053,3421 13323,3421 13333,3411 13333,3071 13293,3031 ; 13211,3555 13211,3559 13213,3561 13413,3561 13548.59,3696.59 ; 13783,3071 13783,3111 13853,3181 14213,3181 14263,3131 14263,2941 14223,2901 14183,2901
  Bottom Layer w50: 13403,4111 13403,4261
  other v3: 2901,3650 5099,3660 2901,4340 5099,4350

## Polygon pours and split planes (outlines as drawn)
GND on Bottom Layer "Bottom Layer-No Net" (solid, shelved, pour order 1000): 3847.08,4796.71 3401.83,4520 3105,4520 3105,5096.47 3123.55,5108 4886,5108 4886,4520 3401.83,4520
GND on Bottom Layer "Bottom Layer-gnd" (solid, shelved, pour order 1000): 2030,3509 4450,3509 4450,2050 2030,2050
GND on Bottom Layer "Bottom Layer-gnd" (solid, shelved, pour order 1001): 4480,3510 6030,3510 6030,2820 5720,2600 4480,2600
GND on Bottom Layer "Bottom Layer-gnd" (solid, shelved, pour order 1000): 3562,4468 4423,4468 4423,3489 3562,3489
GND on Bottom Layer "Bottom Layer-gnd" (solid, shelved, pour order 1000): 4440.04,2570 5603.8,2570 5603.8,2040 4440.04,2040

## Other copper
Top Layer:
  rectangle net MOT0_CUR: 12991,3216 13012,3241
  rectangle net MOT1_CUR: 13093,3216 13114,3241
  region net MOT0_CUR: 12971,3264 12957,3245 12946,3258 12946,3264
  region net MOT1_CUR: 13135,3264 13149,3245 13160,3258 13160,3264
  region net MOT1_A: 13165,3220 13160,3216 13149,3195 13149,3185 13157,3185 13182,3202
  region net MOT_0A: 12941,3220 12946,3216 12957,3195 12957,3185 12949,3185 12924,3202
  region net MOT_0B: 13025,3290 13037,3263 13028,3258 13001,3284 13001,3290
  region net MOT1_B: 13081,3291 13069,3264 13078,3259 13105,3285 13105,3291
  region net VBAT_MOT_SW: 13041,3290 13041,3286 13048,3271 13058,3271 13065,3286 13065,3290
  region net 5VUSB_SW: 13951.32,2951 13905,2963 13888,2963 13888,2939 13906,2939
  region net 3.3V: 14128.34,2951 14178.66,2963 14187.66,2963 14187.66,2939 14175.66,2939
  region net VBAT_SW: 13943,2990 13978,2990 13978,3014 13943,3012.97
  region net NetL2_2: 14151,2975 14175,3010 14197,3011 14195,2987 14157,2968
  region net "VBAT +300": 14147,2929 14171,2894 14193,2893 14191,2917 14153,2936
  region net NetL2_1: 14139,2888 14170,2845 14182,2845 14175,2869 14145,2895
Bottom Layer:
  pour cut-out: 2906,3574.66 2892.28,3576.01 2879.08,3580.02 2866.92,3586.52 2856.26,3595.26 2847.52,3605.92 2841.02,3618.08 2837.01,3631.28 2835.66,3645 2837.01,3658.72 2841.02,3671.92 2847.52,3684.08 2856.26,3694.74 2866.92,3703.48 2879.08,3709.98 2892.28,3713.99 2906,3715.34 2919.72,3713.99 2932.92,3709.98 2945.08,3703.48 2955.74,3694.74 2964.48,3684.08 2970.98,3671.92 2974.99,3658.72 2976.34,3645 2974.99,3631.28 2970.98,3618.08 2964.48,3605.92 2955.74,3595.26 2945.08,3586.52 2932.92,3580.02 2919.72,3576.01
Multi-Layer:
  circle w10: c13053,3681 r1950

## Silkscreen, mask and mechanical layers (free items; w line width, h text height)
Top Overlay:
  drawing of 2367 lines, arcs and shapes, not listed
  text "HCOMM" at 4217,7034 h45 r270
  text "sck" at 3950,6929 h60 r90
  text "mosi" at 4149,6927 h60 r90
  text "selA" at 3855,6926 h60 r90
  text "gnd" at 3554,6924 h50 r90
  text "miso" at 4050,6924 h60 r90
  text "gX" at 3175,6921 h60 r90
  text "gZ" at 3280,6919 h60 r90
  text "Accel" at 4224,6653 h80
  text "Gyro" at 2091,6619 h80
  text "Motor" at 1897,6229 h80
  text "Motor" at 4172,6209 h80
  text "+" at 13395,3413 h60
  text "+" at 12596,3405 h60
  text "chg" at 14670,2837 h45 r50
  text "pow" at 14570,2684 h45 r50
  text "Motor" at 2240,1695 h80
  text "Driver" at 2221,1579 h80
  text "5Vusb" at 5837,1320 h45 r270
  text "Q1B" at 5442,1319 h45 r270
  text "VBATsw" at 5622,1318 h45 r270
  text "33V" at 5934,1318 h50 r270
  text "Q0B" at 5235,1317 h45 r270
  text "VBAT" at 5740,1317 h45 r270
  text "Q1A" at 5335,1316 h45 r270
  text "M1" at 4535,1314 h45 r270
  text "GND" at 4628,1313 h45 r270
  text "Q0A" at 5137,1313 h45 r270
  text "chgen" at 5536,1313 h45 r270
  text "M0" at 4437,1312 h45 r270
  text "p0B" at 4841,1312 h45 r270
  text "p0A" at 4731,1311 h45 r270
  text "p1A" at 4944,1308 h45 r270
  text "p1B" at 5047,1308 h45 r270
  text "Power" at 6059,1148 h80
  text "rone-v1.6" at 4975,1064 h60
  text "HMOT" at 4266,1028 h45 r90
  text "www.mrsl.rice.edu" at 3510,554 h60
Mechanical 1:
  circle w10: c13053,3681 r1850
  circle w10: c14093,2511 r160
  lines w5: 1610,4000 7540,4000 ; 4000,810 4000,6740
Mechanical 3:
  lines w10: 12855.69,3211.69 12868.75,3196.45 12868.69,3219.69
Mechanical 6:
  lines w10: 2266,3299 2677,3299 ccw(c2677,3362) 2740,3362 2740,4638 ccw(c2677,4638) 2677,4701 2266,4701 ; 2266.35,3299.03 ccw(c4000,4000) 3547.16,2185.66 ; 2266.46,4701.24 cw(c4000,4000) 5733.69,4700.88 ; 3547,2186 3547,2740 cw(c4000,2740) 4453,2740 4453,2186 ; 4453.06,2185.71 ccw(c4000,4000) 5733.69,3299.12 ; 5734,3299 5323,3299 cw(c5323,3362) 5260,3362 5260,4638 cw(c5323,4638) 5323,4701 5734,4701
  lines w250: 12126,1934 14126,1934